# EAGLE board Power_Distro_PCB (EAGLE 8.3.2)
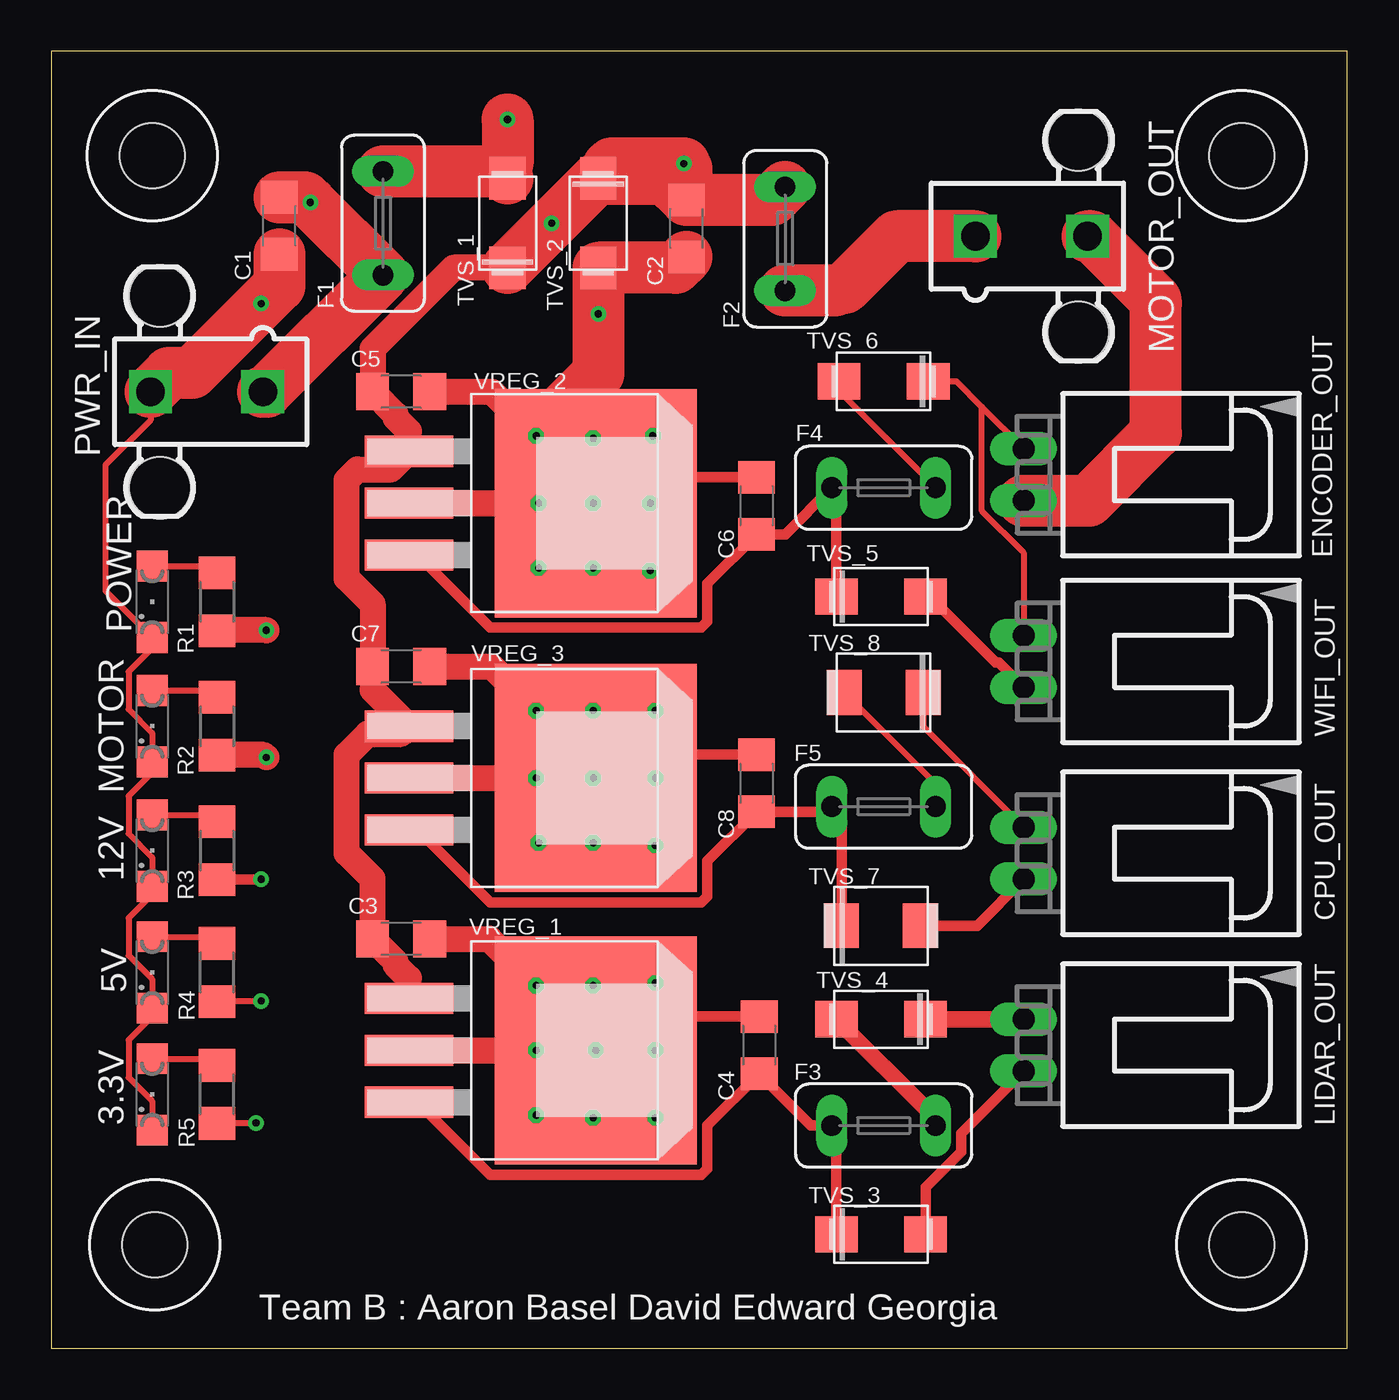
[diagram p0: board, top side]
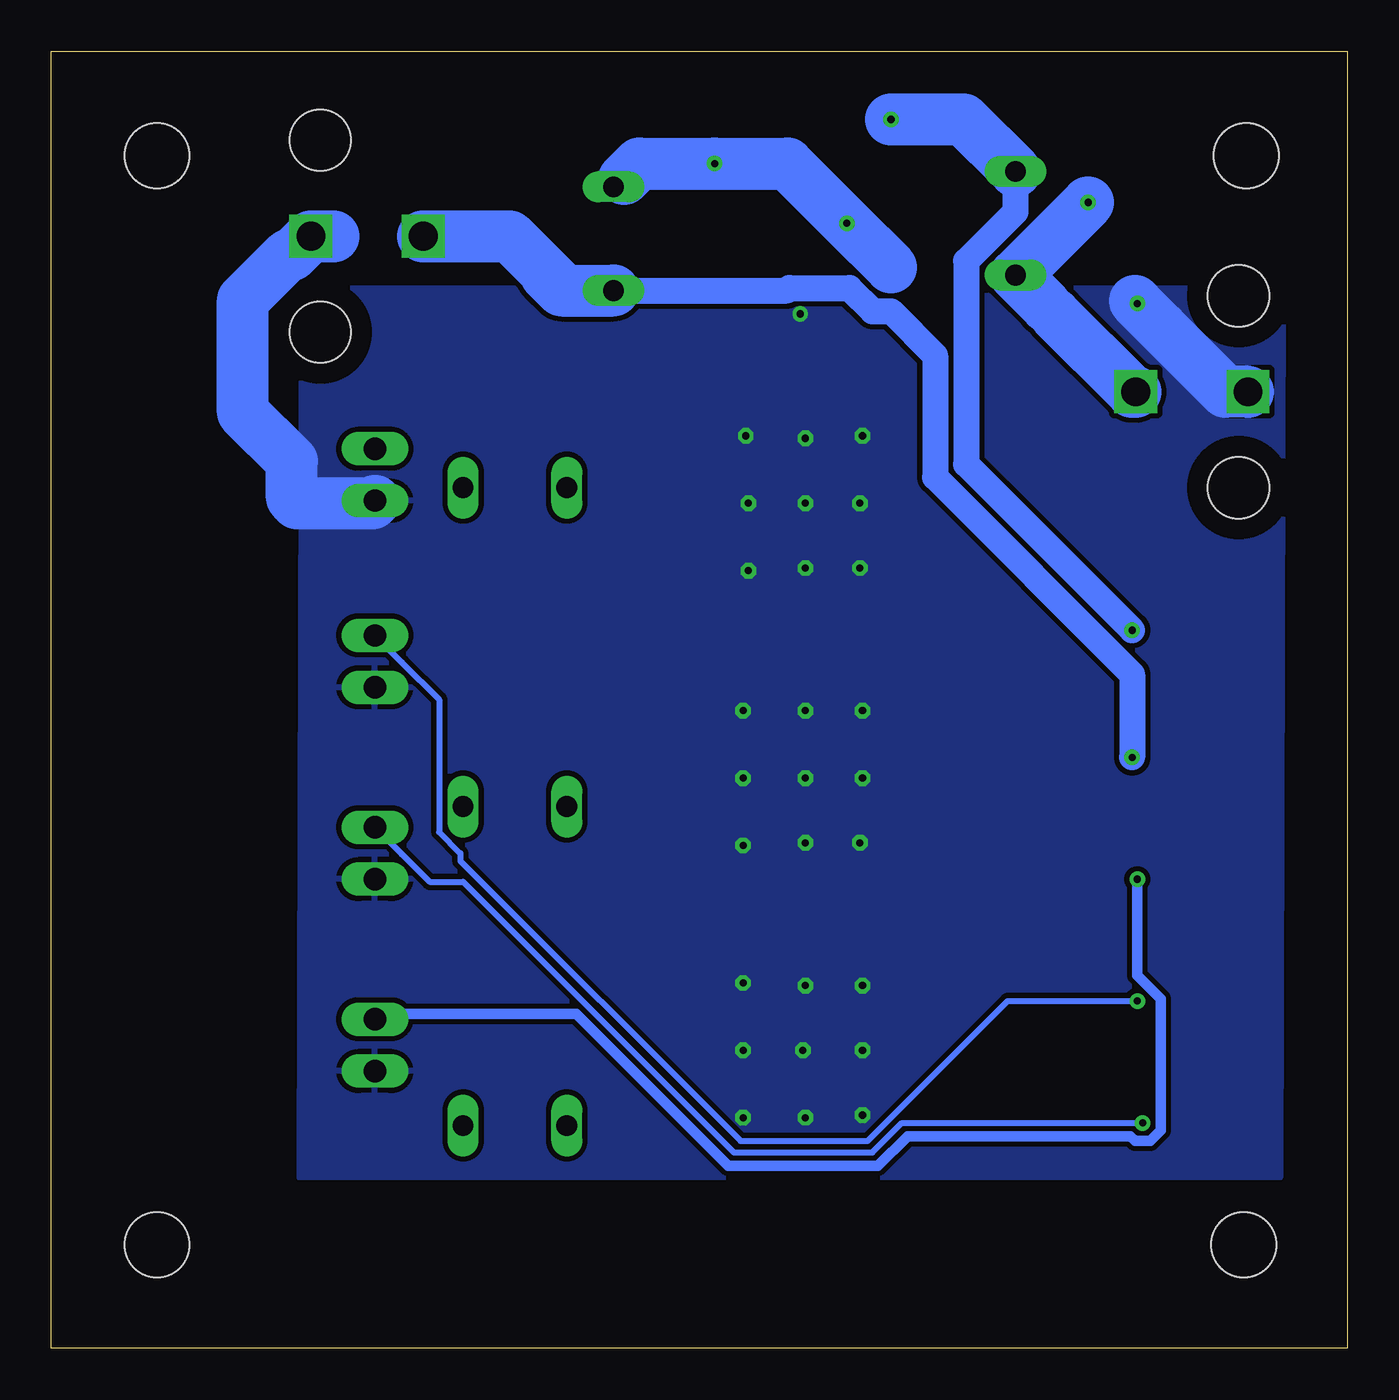
[diagram p1: board, bottom side, seen from below]

Size 63.48 x 63.55 mm. Coordinates in mm from the lower left corner, seen from the top.
Outline: 0,0 63.48,0 63.48,63.55 0,63.55 0,0
Copper layers (1*16): Top 0.035mm / dielectric 1.5mm / Bottom 0.035mm
Design rules "default *": minimum track width 6mil, minimum drill 0.35mm, track to track 6mil, track to pad 6mil, pad to pad 6mil, via to via 6mil, smd to smd 6mil, copper to edge 40mil, drill to drill 6mil, minimum pad ring 10mil, minimum via ring 8mil, stop-mask expansion 4mil, vias tented up to drill 0mil, thermal gap 10mil
Net classes: 0 default: width 0.025 mm, drill 0.254 mm, clearance 0.254 mm; 1 Power IN: width 4.801 mm; 2 Motor_OUT: width 4.801 mm; 3 3.3V_1A: width 0.305 mm; 4 5V_1A: width 0.305 mm; 5 12V_2A: width 0.813 mm
Holes 3.17 mm at 5.08,5.08 58.29,5.08 4.95,58.42 58.29,58.42

## Footprints (pad centres in the part's own frame; a part is rotated, then mirrored left to right if it is on the bottom)
SML1206 = smd 1.5 x 1.5: A 1.75,0; C -1.75,0
C1206 = smd 1.6 x 1.8: 1 -1.4,0; 2 1.4,0
70553-02 = drill 1.092 long: 1 -1.27,-7.62; 2 1.27,-7.62
TE5 = drill 1.016 long: 1 -2.54,0; 2 2.54,0
5566-2 = drill 1.4 square: 1 0,-2.75; 2 0,2.75 | hole 3: 4.7,2.29; -4.7,2.29
R1206 = smd 1.6 x 1.803: 1 -1.422,0; 2 1.422,0
DO-214AC = smd 2.083 x 1.778: 1 -2.184,0; 2 2.184,0
DO-214AA = smd 1.702 x 2.184: 1 -1.93,0 | smd 1.714 x 2.184: 2 1.93,0
TO-263-3 = smd 1.524 x 4.318: 1 -2.54,-7.62; 2 0,-7.62; 3 2.54,-7.62 | smd 11.176 x 9.906: 4 0,1.524

## Placement (x,y rotation side)
3.3V  GREEN  [SML1206]  4.95,12.45 90 top
5V  GREEN  [SML1206]  4.95,18.41 90 top
12V  GREEN  [SML1206]  4.95,24.38 90 top
C1  150uF  [C1206]  11.18,54.99 90 top
C2  100uF  [C1206]  31.11,54.86 90 top
C3  10uF  [C1206]  17.14,20.07 180 top
C4  10uF  [C1206]  34.67,14.86 270 top
C5  10uF  [C1206]  17.14,46.86 180 top
C6  10uF  [C1206]  34.54,41.27 270 top
C7  10uF  [C1206]  17.14,33.4 180 top
C8  10uF  [C1206]  34.54,27.69 270 top
CPU_OUT  C-GRID-02-70553  [70553-02]  55.24,24.26 270 top
ENCODER_OUT  C-GRID-02-70553  [70553-02]  55.24,42.8 270 top
F1  24V_20A  [TE5]  16.26,55.12 90 top
F2  24V, 15A  [TE5]  35.94,54.36 270 top
F3  12V_2A  [TE5]  40.77,10.92 0 top
F4  5V_1A  [TE5]  40.77,42.16 0 top
F5  3.3V_1A  [TE5]  40.77,26.54 0 top
LIDAR_OUT  C-GRID-02-70553  [70553-02]  55.24,14.86 270 top
MOTOR  GREEN  [SML1206]  4.95,30.48 90 top
MOTOR_OUT  5566-2  [5566-2]  48.01,54.48 270 top
POWER  GREEN  [SML1206]  4.95,36.58 90 top
PWR_IN  5566-2  [5566-2]  7.62,46.86 90 top
R1  1100  [R1206]  8.13,36.58 90 top
R2  1100  [R1206]  8.13,30.48 90 top
R3  500  [R1206]  8.13,24.38 90 top
R4  150  [R1206]  8.13,18.41 270 top
R5  65  [R1206]  8.13,12.45 270 top
TVS_1  26V  [DO-214AC]  22.35,55.12 90 top
TVS_2  26V  [DO-214AC]  26.8,55.12 270 top
TVS_3  16V  [DO-214AC]  40.64,5.59 0 top
TVS_4  16V  [DO-214AC]  40.64,16.13 180 top
TVS_5  5V  [DO-214AC]  40.64,36.83 0 top
TVS_6  5V  [DO-214AC]  40.77,47.37 180 top
TVS_7  3V3  [DO-214AA]  40.64,20.7 0 top
TVS_8  3V3  [DO-214AA]  40.77,32.13 180 top
VREG_1  12V  [TO-263-3]  25.15,14.61 270 top
VREG_2  5V  [TO-263-3]  25.15,41.4 270 top
VREG_3  3V3  [TO-263-3]  25.15,27.94 270 top
WIFI_OUT  C-GRID-02-70553  [70553-02]  55.24,33.66 270 top

## Library data of the parts
3.3V 5V 12V MOTOR POWER = led
C1-C8 R1-R5 = resistor
CPU_OUT ENCODER_OUT LIDAR_OUT WIFI_OUT = con-molex; OC_FARNELL: unknown; OC_NEWARK: unknown
F1-F5 = fuse; OC_FARNELL: unknown; OC_NEWARK: unknown
MOTOR_OUT PWR_IN = con-molex; OC_FARNELL: 1822072; OC_NEWARK: unknown
TVS_1-TVS_8 VREG_1-VREG_3 = POWER_DISTRO

## Nets
5V_REG: ENCODER_OUT.1 R4.2 TVS_6.1 WIFI_OUT.1
12V_REG: LIDAR_OUT.1 R3.1 TVS_4.1
24V_REG: C2.2 C3.2 C5.2 C7.2 F2.1 TVS_1.1 TVS_2.1 VREG_1.1 VREG_2.1 VREG_3.1
24V_REG_MOTOR: F2.2 MOTOR_OUT.1 R2.1
GND: 3.3V.C 5V.C 12V.C C1.1 C2.1 C3.1 C4.1 C5.1 C6.1 C7.1 C8.1 CPU_OUT.2 ENCODER_OUT.2 LIDAR_OUT.2 MOTOR.C MOTOR_OUT.2 POWER.C PWR_IN.2 TVS_2.2 TVS_3.2 TVS_5.2 TVS_7.2 VREG_1.2 VREG_1.4 VREG_2.2 VREG_2.4 VREG_3.2 VREG_3.4 WIFI_OUT.2
N$1: POWER.A R1.2
N$2: 12V.A R3.2
N$3: C1.2 F1.1 PWR_IN.1
N$4: F5.2 TVS_8.2
N$5: CPU_OUT.1 R5.2 TVS_8.1
N$6: C8.2 F5.1 TVS_7.1 VREG_3.3
N$7: C6.2 F4.1 TVS_5.1 VREG_2.3
N$8: MOTOR.A R2.2
N$9: F1.2 R1.1 TVS_1.2
N$10: C4.2 F3.1 TVS_3.1 VREG_1.3
N$11: F4.2 TVS_6.2
N$17: F3.2 TVS_4.2
N$18: 3.3V.A R5.1
N$20: 5V.A R4.1

## Tracks (layer width: path | path; a pad name or v marks a point on that pad's centre or on a via)
5V_REG  (via drill 0.35)
  Top 0.305: TVS_6.1 44.32,47.37 45.58,46.11 | 45.58,46.11 ENCODER_OUT.1 | 45.58,46.11 45.58,41.02 47.62,38.98 WIFI_OUT.1 | v10.29,17.02 10.26,16.99 R4.2
  Bottom 0.305: WIFI_OUT.1 46.31,33.61 46.3,33.61 44.48,31.79 44.48,25.3 43.43,24.26 43.43,23.88 29.72,10.16 23.5,10.16 16.64,17.02 v10.29,17.02
12V_REG  (via drill 0.35)
  Top 0.508: v10.29,22.99 10.26,22.96 R3.1
  Top 0.813: TVS_4.1 LIDAR_OUT.1
  Bottom 0.508: LIDAR_OUT.1 47.37,16.38 37.76,16.38 30.32,8.94 22.99,8.94 21.54,10.39 10.63,10.39 10.4,10.16 9.67,10.16 9.15,10.68 9.15,17.13 10.29,18.27 v10.29,22.99
  Bottom 0.813: 47.1,16.13 LIDAR_OUT.1
24V_REG  (via drill 0.35)
  Top 1.27: TVS_1.1 19.71,52.93 15.74,48.97 C5.2 16.86,45.75 16.86,45.59 17.53,44.92 VREG_2.1 16.64,43.05 15,43.05 14.48,42.53 14.48,37.73 15.74,36.47 C7.2 15.74,32.26 VREG_3.1 17.14,30.1 15.51,30.1 14.48,29.07 14.48,24.27 15.74,23 C3.2 16.86,18.95 16.86,18.8 17.53,18.13 VREG_1.1
  Top 2.54: C2.2 30.08,57.3 TVS_2.1 26.72,57.3 TVS_1.1 | C2.2 35.31,56.26 F2.1 | C2.2 31.11,57.78 30.99,57.91 v30.99,58.04 27.43,58.04 27.3,57.91
  Bottom 2.54: 35.43,57.28 34.67,58.04 v30.99,58.04 27.43,58.04 v24.51,55.12 22.35,52.96
24V_REG_MOTOR  (via drill 0.35)
  Top 1.27: v10.54,28.96 10.44,29.06 R2.1
  Top 2.54: 38.4,51.82 F2.2 | MOTOR_OUT.1 41.4,54.48 38.86,51.94
  Bottom 1.27: F2.2 27.45,51.82 27.32,51.94 24.39,51.94 23.25,50.8 22.35,50.8 20.19,48.64 20.19,42.68 10.54,33.02 v10.54,28.96
  Bottom 2.54: 38.48,51.82 F2.2 | 38.48,51.82 39.24,52.58 | MOTOR_OUT.1 41.02,54.48 38.48,51.94 38.48,51.82
GND  (via drill 0.35)
  Top 0.152: VREG_2.4 arc-45 26.4,40.75 v23.88,38.23 | VREG_2.4 26.67,41.17 arc-45 26.3,40.27 23.5,37.47 | VREG_2.4 26.67,38.53 arc-45 v26.54,38.23 | VREG_2.4 26.67,38.41 arc-45 26.54,38.1 | VREG_3.4 v26.54,27.94 | VREG_1.4 29.97,11.68
  Top 0.305: PWR_IN.2 4.87,45.48 2.66,43.27 2.66,37.12 POWER.C 4.95,34.3 3.8,33.15 3.8,31.31 4.95,30.16 MOTOR.C 4.95,28.21 3.8,27.05 3.8,25.22 4.95,24.06 12V.C 4.95,22.24 3.8,21.08 3.8,19.25 4.95,18.09 5V.C 4.95,16.27 3.8,15.11 3.8,13.28 4.95,12.12 3.3V.C | v26.54,27.94 24.13,27.94 | 26.54,38.1 26.67,38.23
  Top 0.508: WIFI_OUT.2 46.41,33.6 46.26,33.6 43.02,36.83 TVS_5.2 | C6.1 30.61,42.67 v29.34,41.4 | C8.1 30.74,29.09 v29.59,27.94 | TVS_7.2 45.34,20.7 CPU_OUT.2 | C4.1 31.25,16.26 v29.59,14.61 | LIDAR_OUT.2 44.58,10.54 44.58,9.63 42.82,7.88 TVS_3.2
  Top 1.27: C3.1 21.46,20.07 v23.75,17.78 | C7.1 21.59,33.4 v23.75,31.24 | VREG_1.2 v23.75,14.61 | VREG_2.2 v23.88,41.4 | C5.1 21.59,46.86 v23.75,44.7 | VREG_3.2 v23.75,27.94 | v29.34,41.4 30.86,39.88
  Top 2.54: ENCODER_OUT.2 50.8,41.53 54.1,44.83 54.1,51.18 54.08,51.2 54.08,51.35 50.95,54.48 MOTOR_OUT.2 | PWR_IN.2 5.78,47.78 6.9,47.78 11.18,52.05 C1.1 | C2.1 30.59,52.93 TVS_2.2 v26.8,50.67 26.8,47.75 v23.75,44.7
  Bottom 2.54: 49.66,54.48 MOTOR_OUT.2 51.67,53.57 51.86,53.57 54.08,51.35 54.08,45.85 51.69,43.46 51.69,41.66 51.44,41.4 47.75,41.4 ENCODER_OUT.2 | PWR_IN.2 5.98,46.86 9.12,49.99 9.12,50.01 v10.29,51.18 10.41,51.31
  other vias: 26.67,14.61 26.54,11.3 26.54,17.78 23.75,11.43 29.59,11.3 29.59,17.91 26.54,31.24 29.59,31.24 29.59,24.64 26.54,24.77 23.88,24.77 26.54,41.4 26.54,44.58 29.46,44.7 29.34,38.1
  pour Bottom: 3.17,51.94 3.3,8.38 51.31,8.38 51.18,51.94
N$1
  Top 0.305: POWER.A 7.8,38.33 R1.2
N$2
  Top 0.305: 12V.A 7.8,26.13 R3.2
N$3  (via drill 0.35)
  Top 2.54: PWR_IN.1 10.54,46.86 F1.1 v12.7,56.13 12.44,56.39 C1.2
  Bottom 2.54: PWR_IN.1 10.54,46.86 14.35,50.67 | 14.73,51.05 F1.1 v12.7,56.13
N$4
  Top 0.305: F5.2 43.31,27.66 TVS_8.2
N$5  (via drill 0.35)
  Top 0.305: 47.24,25.53 CPU_OUT.1 42.7,30.45 TVS_8.1 | v10.03,11.05 10.01,11.02 R5.2
  Bottom 0.305: CPU_OUT.1 46.31,24.21 46.3,24.21 44.95,22.86 43.31,22.86 30.05,9.6 23.26,9.6 21.82,11.05 v10.03,11.05
N$6
  Top 0.508: TVS_7.1 38.71,26.06 38.29,26.48 | 38.29,26.48 F5.1 | VREG_3.3 17.95,25.4 21.51,21.84 31.83,21.84 32.13,22.14 32.13,23.87 C8.2 38.1,26.29 38.29,26.48
N$7
  Top 0.508: VREG_2.3 17.95,38.86 21.51,35.31 31.83,35.31 32.13,35.6 32.13,37.46 C6.2 35.94,39.88 F4.1 38.46,41.94 TVS_5.1
  Top 1.27: F4.1 38.23,41.81
N$8
  Top 0.305: MOTOR.A 7.8,32.23 R2.2
N$9  (via drill 0.35)
  Top 1.27: v10.54,35.18 8.15,35.18 R1.1
  Top 2.54: F1.2 22,57.66 TVS_1.2 | v22.35,60.2 22.35,58.04
  Bottom 1.27: F1.2 16.26,55.67 18.67,53.26 18.67,43.31 v10.54,35.18
  Bottom 2.54: F1.2 18.8,60.2 v22.35,60.2
N$10
  Top 0.508: VREG_1.3 17.95,12.06 21.51,8.51 31.83,8.51 32.13,8.81 32.13,10.92 C4.2 37.21,10.92 F3.1 38.46,10.69 TVS_3.1
N$11
  Top 0.305: TVS_6.2 38.58,46.89 F4.2
N$17
  Top 0.813: F3.2 arc45 43.06,11.53 TVS_4.2
N$18
  Top 0.305: 3.3V.A 7.8,14.2 R5.1
N$20
  Top 0.305: 5V.A 7.8,20.16 R4.1

## Text on the board
tNames: Team B : Aaron Basel David Edward Georgia
tDocu: **NOTE : / / There will be 27 DRC overlap errors. / Those are all vias within the GND pad of / the 3 linear voltage regulators included. / These are added on purpose, with thermals generated, / will help with power dissipation to the ground plane / at the bottom.